# Altium PCB STM32_DAQ_Control_Board.PcbDoc (part 2 of 2)
Units mil, origin at the board's own origin, x right, y up, seen from the top; angles counter-clockwise.
Board outline 2345 x 2362.2 mil, 2 copper layers (Top Layer, Bottom Layer); 78 components, 52 nets, 252 pads, 148 vias.
Unrouted connection lines stored in the file: 1.
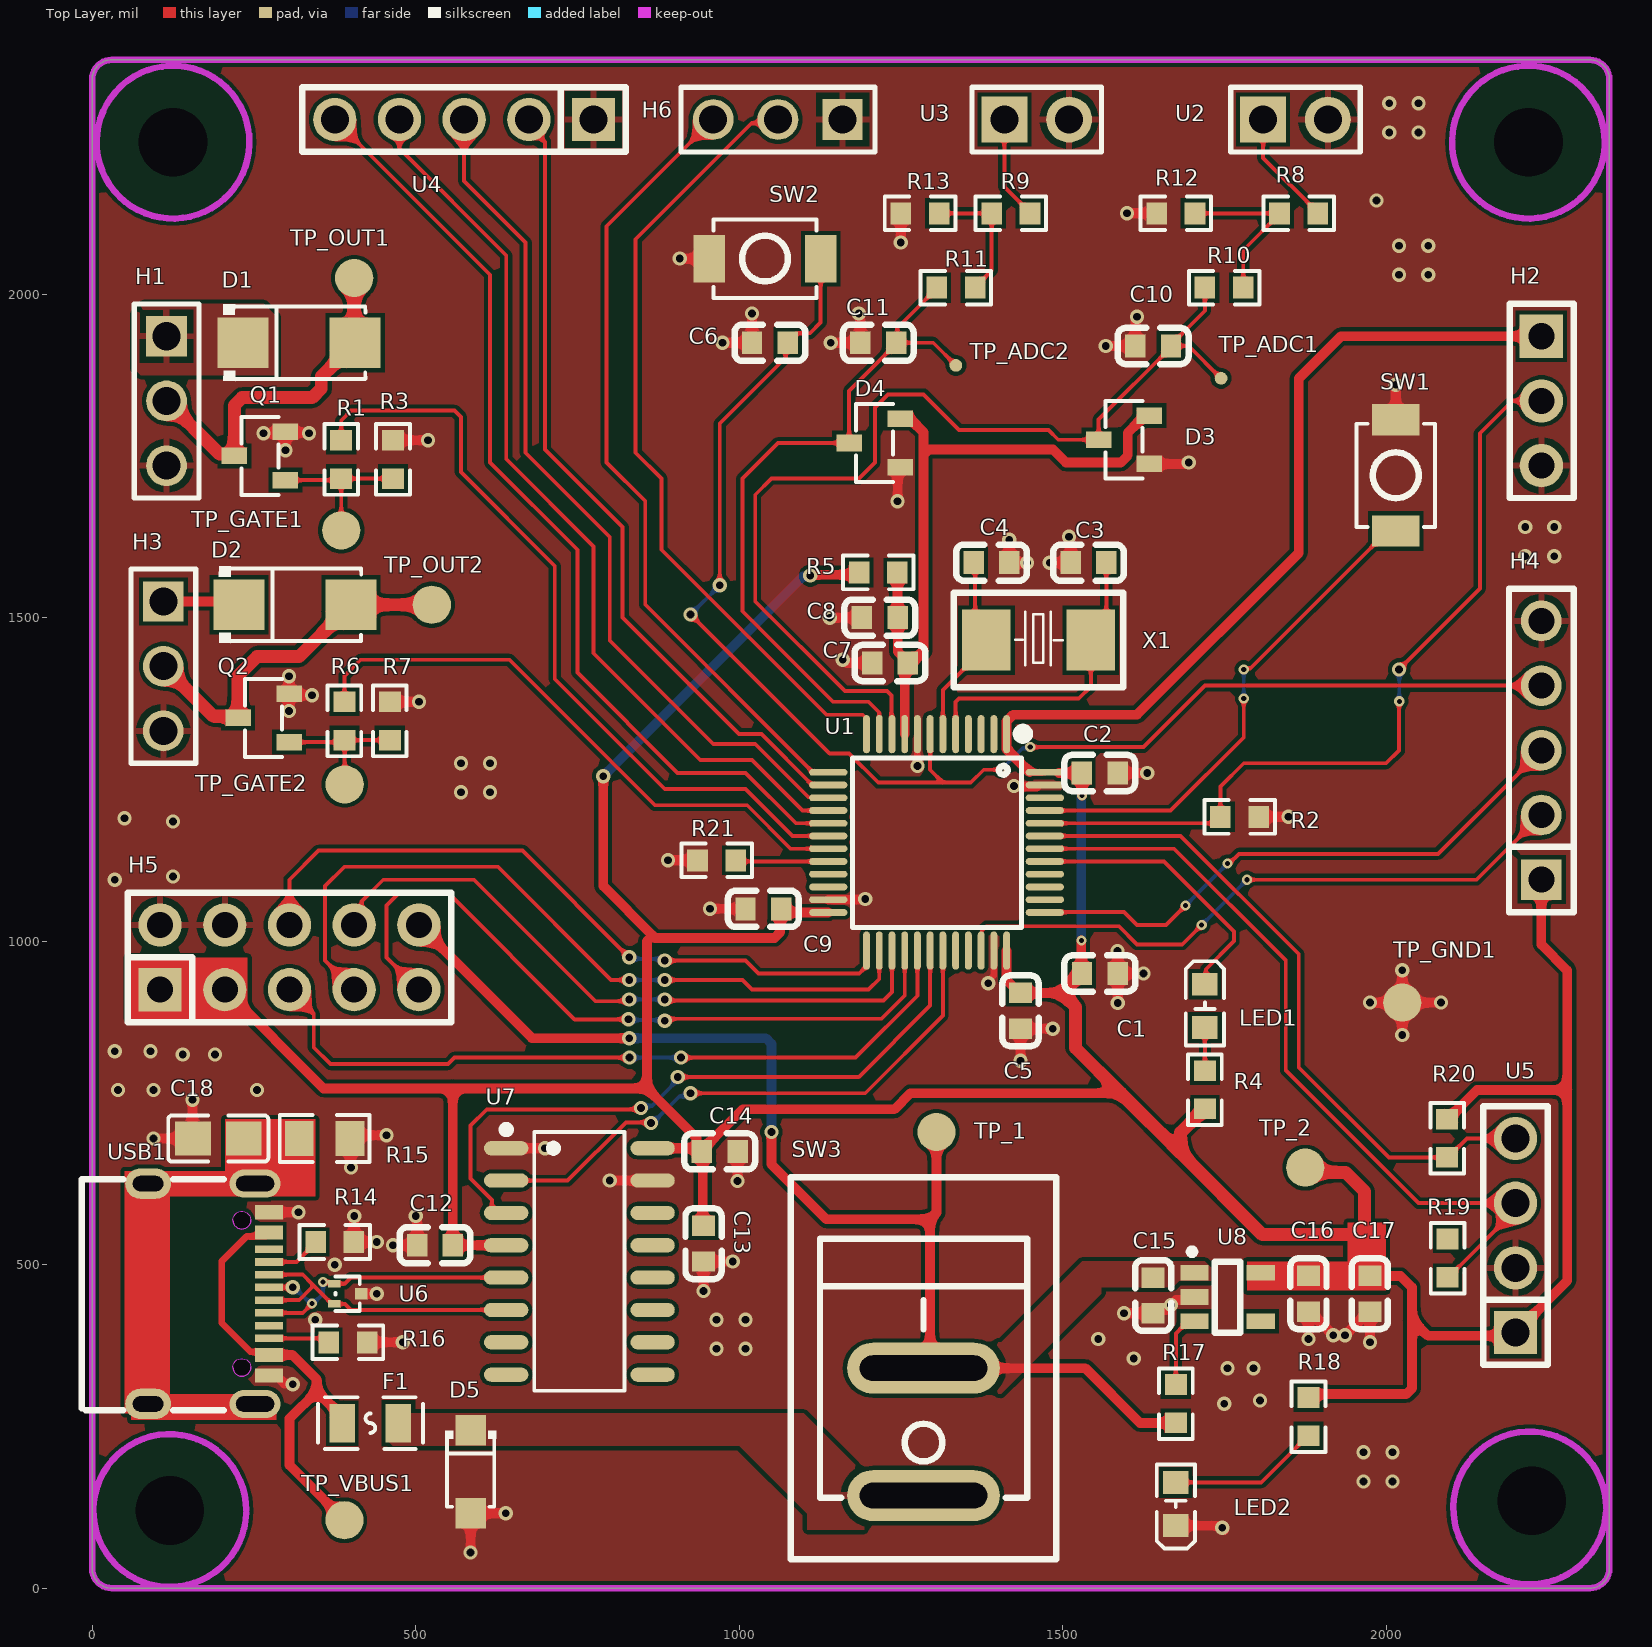
[diagram p0: Top Layer view]

## Via types
v1: diameter 22, hole 12, Top Layer to Bottom Layer, tented both sides, 135 vias
v2: diameter 15.75, hole 7.87, Top Layer to Bottom Layer, tented both sides, 13 vias

## Nets (pads, with @x,y where several pads share a name; then routed paths per layer and width w, separated by ;. In a path a pad name is that pad's centre, name@x,y a point inside that pad or via, vN(x,y) a via of type N, cw(c..) or ccw(c..) an arc to the next point about the centre after c; other vN are vias at no path point) (continued)
USART2_TX: (continued)
  Top Layer w6: H6.2 1054.5,2264.5 1019.5,2264.5 840,2085 840,1755 880,1715 880,1605 1135,1350 1191.09,1350 1196.9,1344.19 U1.12
USB_DM: U6.2 U7.6 USB1.A7 USB1.B7 | length 469.1
  Top Layer w6: USB1.A7 320.1,445.1 340,465 340,470 ; USB1.B7 325.5,484.5 340,470 ; U7.6 400,430 390.8,439.2 U6.2 370.25,439.2 367.45,442 367.45,442.55 340,470
USB_DP: U6.1 U7.5 USB1.A6 USB1.B6 | length 478.8
  Top Layer w6: USB1.B6 325.5,425.5 v2(340,440) ; USB1.A6 273.6,464.9 309.9,464.9 v1(310,465) ; v2(356.87,473.13) 371.67,473.13 U6.1 390.7,470.7 400,480 U7.5
  Bottom Layer w6: v1(310,465) 312.5,465 337.5,440 342.16,440 356.87,454.7 v2(356.87,473.13)
VBUS_FUSED: D5.1 F1.1 SW3.1
VBUS_RAW: F1.2 TP_VBUS1.1 USB1.A4B9 USB1.B4A9 | length 706.4
  Top Layer w10: USB1.B4A9 268.64,365.36 244.64,365.36 200,410 200,505 238.65,543.65 267.65,543.65 USB1.A4B9
  Top Layer w15: USB1.B4A9 309.5,360.5 347.25,322.75 347.25,304.3 ; F1.2 386.7,264.85 347.25,304.3 ; TP_VBUS1.1 305,190 305,262.05 347.25,304.3
VDDA_3V3: C7.2 C8.2 D3.2 D4.2 R5.2 U1.9 | length 1074
  Top Layer w15: R5.2 1250,1570 1244.85,1564.85 1244.85,1500.15 C8.2 1245,1447.75 1256,1436.75 U1.9 ; C7.2 1260.8,1431.95 1269.05,1440.2 1276.21,1440.2 1285,1448.99 1285,1751.21 ; D4.2@1264.3,1807.4 1285,1786.7 1285,1751.21 ; D3.2 1627.4,1812.4 1600.89,1785.89 1600.89,1750.89 1590,1740 1505,1740 1485,1760 1293.79,1760 1285,1751.21
VLOAD_EXT1: D1.1 H1.1
VLOAD_EXT2: D2.1 H3.1 | length 118.9
  Top Layer w15: H3.1 221.8,1525 D2.1
pads on no net: U1.2 U1.3 U1.4 U1.21 U1.22 U1.32 U1.33 U1.38 U1.39 U1.40 U1.46 U7.7 U7.8 U7.9 U7.10 U7.11 U7.12 U7.13 U7.14 U8.4 USB1.A8 USB1.B8

## Polygon pours and split planes (outlines as drawn)
GND on Top Layer "GND_L01_P004" (solid, remove dead copper, pour order 4): -140,2295 -25,2410 2410,2410 2410,-80 2420,-90 -105,-90 -105,2260
VBUS_FUSED on Top Layer "VBUS_FUSED_L01_P000" (solid, pour order 0): 455,285 470,270 1100,270 1195,175 1425,175 1425,100 1415,90 1105,90 1105,115 1000,220 465,220 455,230
+5V_SYS on Top Layer "+5V_SYS_L01_P001" (solid, pour order 1): 1160,350 1190,380 1405,380 1530,505 1720,505 1730,495 1730,475 1680,475 1670,465 1560,465 1560,455 1405,300 1160,300
VLOAD_EXT1 on Top Layer "VLOAD_EXT1_L01_P002" (solid, pour order 2): 65,1970 80,1985 265,1985 285,1965 285,1875 75,1875 65,1885
GND on Bottom Layer "GND_L02_P003" (solid, remove dead copper, pour order 3): -5,2405 2400,2405 2400,-40 2285,-155 -130,-155 -130,2280 -95,2315

## Keep-outs
Top Layer:
  lines w10: 238.04,116.07 cw(c120,120) 238.11,120 ; 243.04,2231.07 cw(c125,2235) 243.11,2235 ; 2338.04,2231.07 cw(c2220,2235) 2338.11,2235 ; 2340,120 cw(c2221.96,123.93) 2340.07,123.93
Keep-Out Layer:
  the board outline again, w10

## Other copper
Top Layer:
  rectangle net SHIELD: 205,605 345,725
  rectangle net SHIELD: 50,605 280,645
  rectangle net SHIELD: 60,260 285,300
  rectangle net SHIELD: 50,270 120,645
  rectangle net 3.3V: 55,880 240,975
  rectangle net 3.3V: 1785,460 2000,505
  rectangle net 3.3V: 1940,460 2000,565

## Silkscreen, mask and mechanical layers (free items; w line width, h text height)
Mechanical 1:
  the board outline again, w10